# Altium PCB cs301_Group-12-4 holes.PcbDoc
Units mm, origin at the board's own origin, x right, y up, seen from the top; angles counter-clockwise.
Board outline 87.88 x 127 mm, 2 copper layers (Top Layer, Bottom Layer); 146 components, 108 nets, 428 pads, 69 vias.
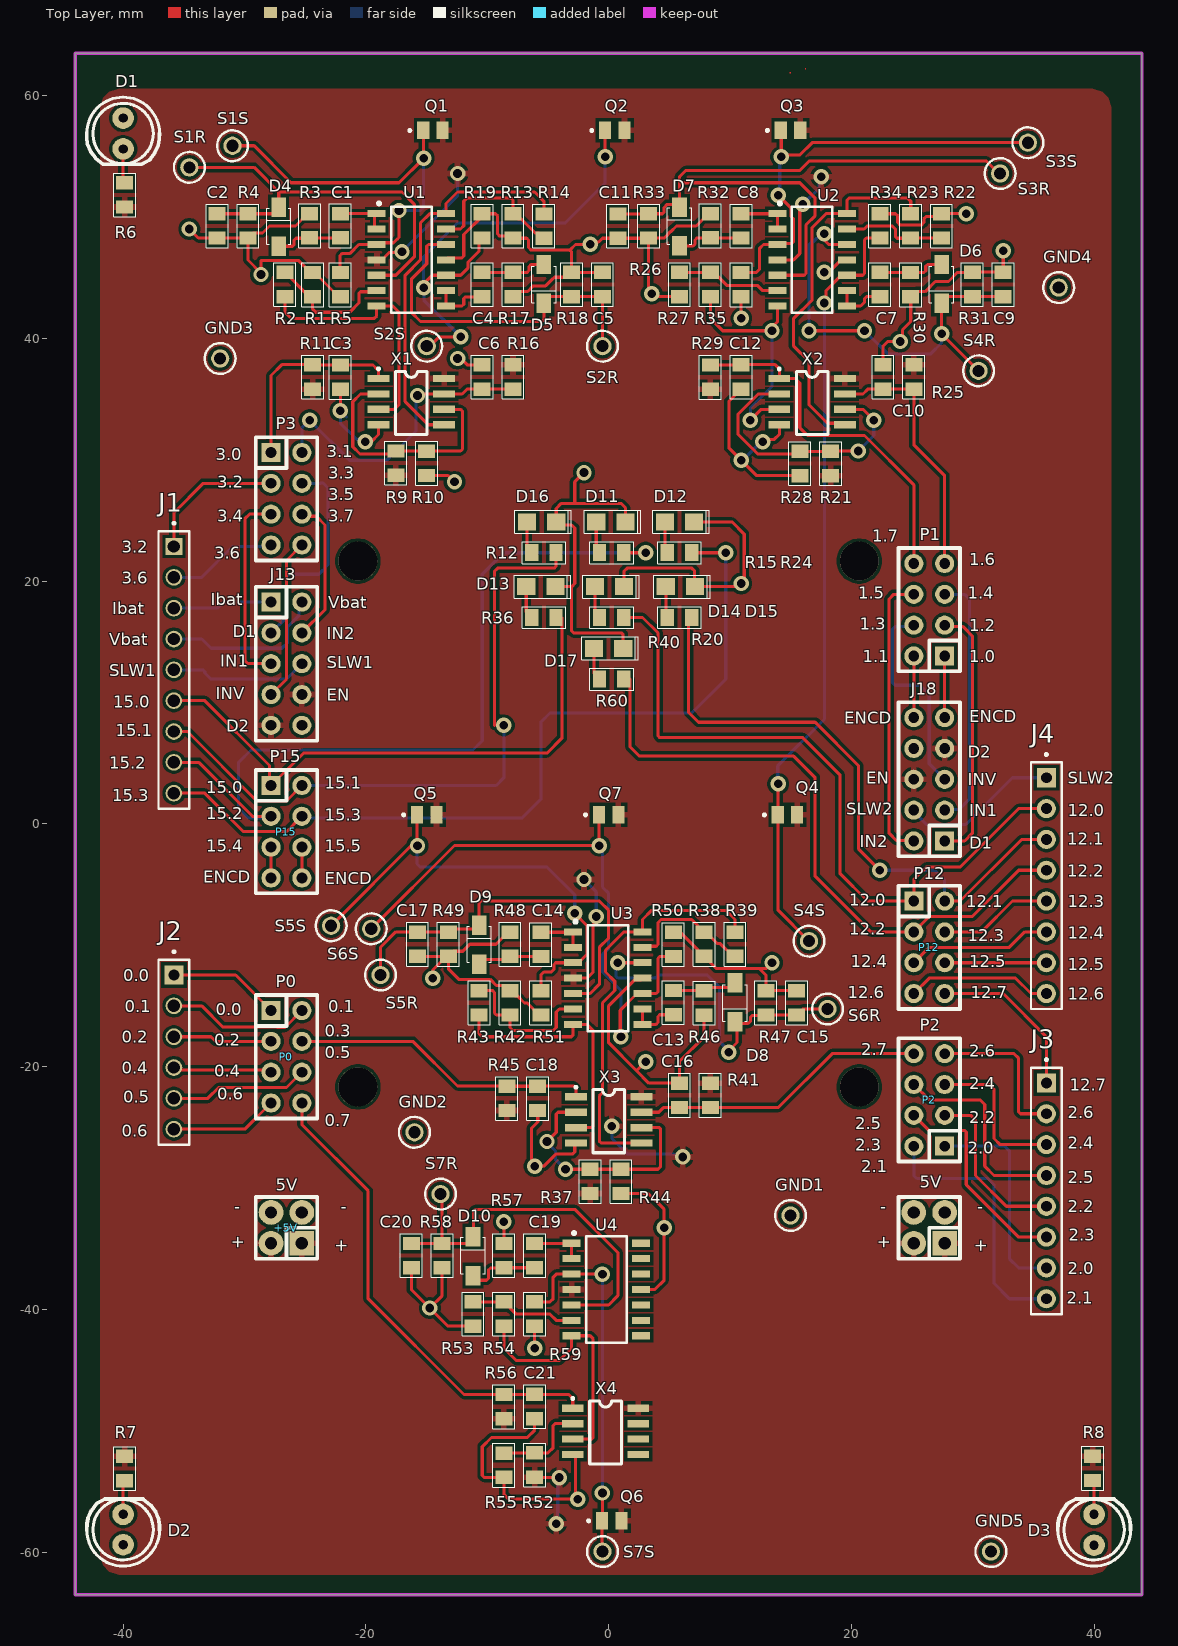
[diagram p0: Top Layer view]
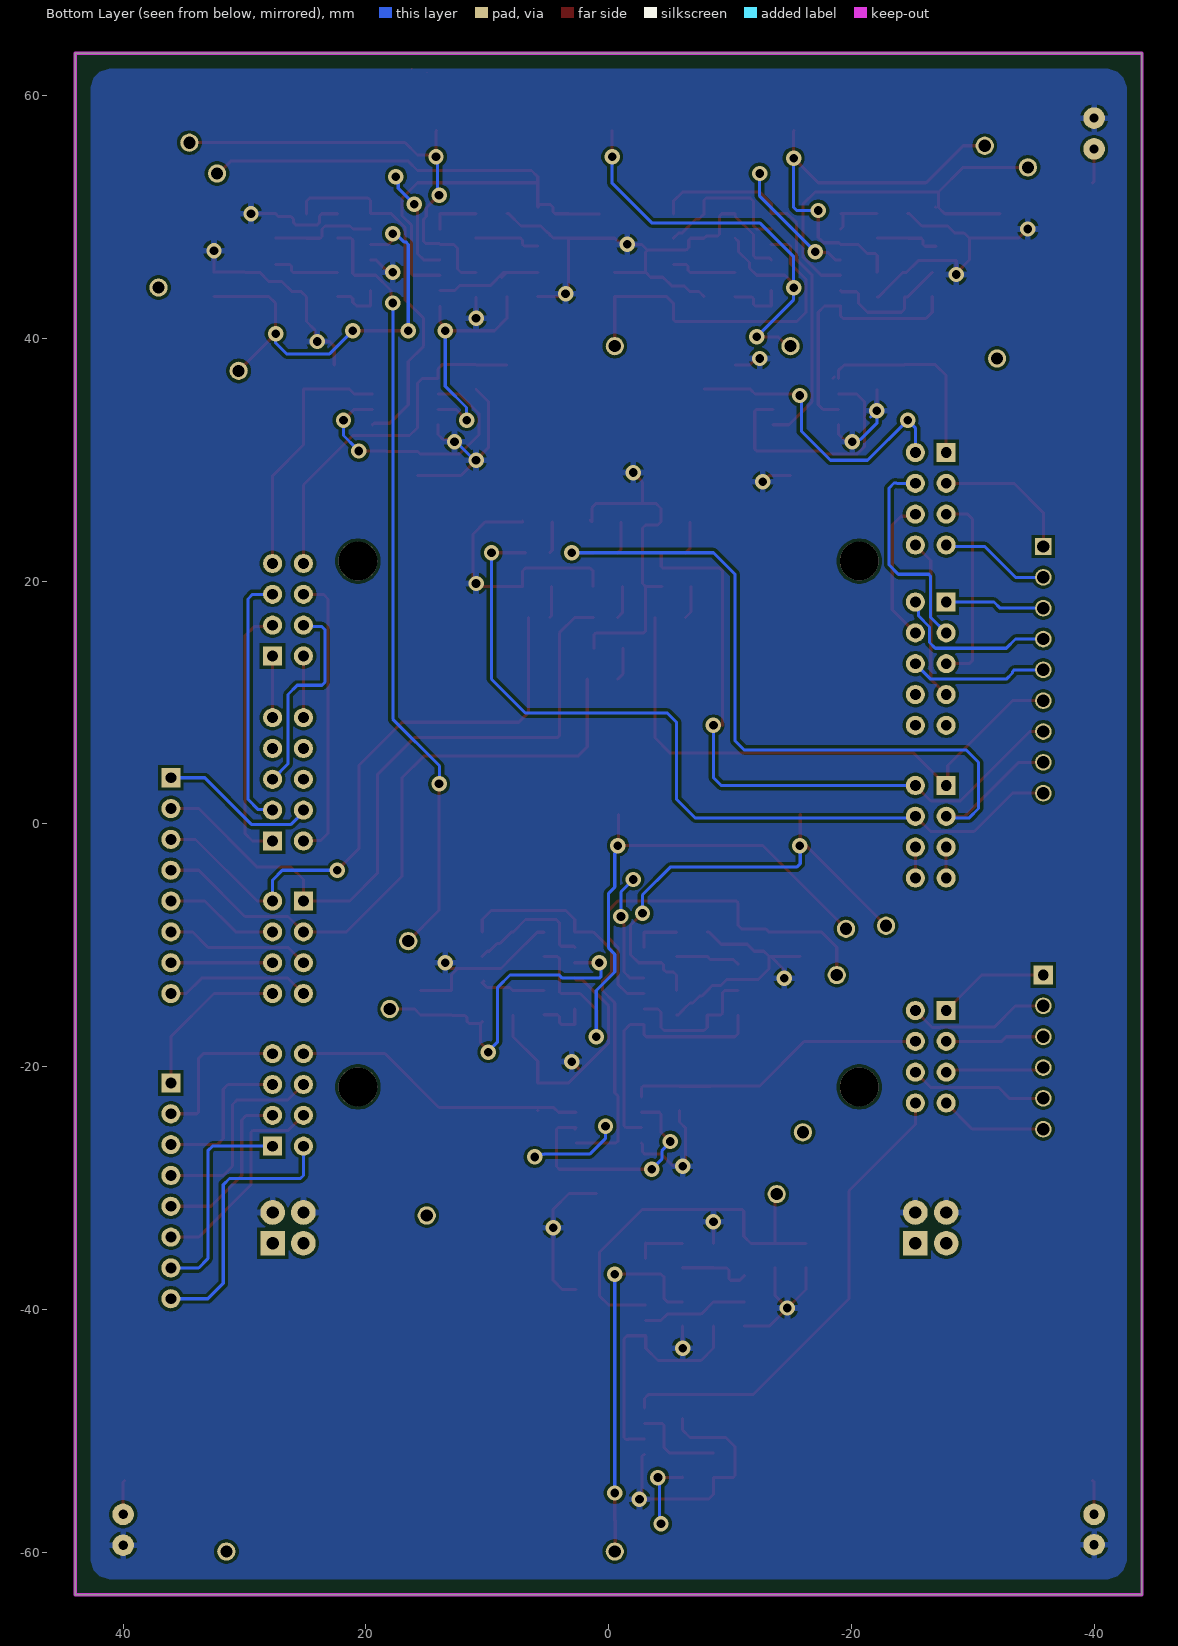
[diagram p1: Bottom Layer view, seen from below]

## Layer stack, top to bottom
Top Solder: solder mask 0.0102, Solder Resist, Dk 3.5
Top Layer: signal copper 0.0356
Dielectric1: dielectric 0.32, FR-4, Dk 4.8
Bottom Layer: signal copper 0.0356
Bottom Solder: solder mask 0.0102, Solder Resist, Dk 3.5

## Board outline
-43.942,-63.5 -43.942,63.5 43.942,63.5 43.942,-63.5

## Design rules (kind name [scope] priority, off if disabled: settings)
Clearance [All] p1: gap=0.254 ignorepadtopadclearanceinfootprint=FALSE except(0: Arc-Hole Track-Hole SMDPad-Hole THPad-Hole Via-Hole Fill-Hole Poly-Hole Region-Hole Text-Hole)
HoleSize [All] p1: absolutevalues=TRUE maxlimit=3.2 minlimit=0.025 maxpercent=80.000 minpercent=20.000
PolygonConnect [All] p1: connectstyle=Relief reliefconductorwidth=0.508 reliefentries=4 polygonreliefangle="90 Angle" airgapwidth=0.254
RoutingVias [All] p1: holewidth=0.711 width=1.27 viastyle="Through Hole" minholewidth=0.711 minwidth=1.27 maxholewidth=0.711 maxwidth=1.27
SMDToCorner [All] p1: distance=157480
SilkToSolderMaskClearance SilkscreenOverComponentPads [IsText] p1: minsilkscreentomaskgap=0.254 clearancetoexposedcopper=TRUE
SolderMaskExpansion [All] p1: expansion=0.102 istentingtop=FALSE
Width [All] p1: maxlimit=0.762 minlimit=0.254 preferedwidth=0.254 minimp=50.000000 maximp=50.000000 favimp=50.000000
28 further rules are at their usual default settings.

## Classes and differential pairs
component class Sensors: C7 C8 C9 C10 C11 C12 C13 C14 C15 C16 C17 C18 C19 C20 C21 D6 D7 D8 D9 D10 Q3 Q4 Q5 Q6 Q7 R21 R22 R23 R25 R26 R27 R28 R29 R30 R31 R32 R33 R34 R35 R37 R38 R39 R41 R42 R43 R44 R45 R46 R47 R48 R49 R50 R51 R52 R53 R54 R55 R56 R57 R58 R59 S3R S3S S4R S4S S5R S5S S6R S6S S7R S7S U2 U3 U4 X2 X3 X4

## Components (designator, comment, footprint, x,y, rotation, side; value= is the part's Value field where it differs from the comment)
5V "5V" IDC4 27.686,-34.544 r90 top locked
+5V "5V" IDC4 -25.273,-34.544 r90 top locked
C1 "*" "0805 CAP" -22.098,49.292 r270 top
C2 "*" "0805 CAP" -32.258,49.276 r270 top
C3 "*" "0805 CAP" -22.098,36.814 r270 top
C4 "*" "0805 CAP" -10.414,44.45 r90 top
C5 "*" "0805 CAP" -0.508,44.45 r90 top
C6 "*" "0805 CAP" -10.414,36.83 r90 top
C7 "*" "0805 CAP" 22.352,44.45 r90 top
C8 "*" "0805 CAP" 10.922,49.276 r270 top
C9 "*" "0805 CAP" 32.512,44.45 r90 top
C10 "*" "0805 CAP" 22.606,36.83 r90 top
C11 "*" "0805 CAP" 0.762,49.26 r270 top
C12 "*" "0805 CAP" 10.922,36.83 r270 top
C13 "*" "0805 CAP" 5.334,-14.716 r90 top
C14 "*" "0805 CAP" -5.588,-9.922 r270 top
C15 "*" "0805 CAP" 15.494,-14.732 r90 top
C16 "*" "0805 CAP" 5.842,-22.352 r90 top
C17 "*" "0805 CAP" -15.748,-9.906 r270 top
C18 "*" "0805 CAP" -5.842,-22.606 r270 top
C19 "*" "0805 CAP" -6.096,-35.56 r270 top
C20 "*" "0805 CAP" -16.256,-35.56 r270 top
C21 "*" "0805 CAP" -6.096,-47.99 r270 top
D1 "LED" LED0.1/5MM#1 -40,55.62 r180 top locked
D2 "LED" LED0.1/5MM#2 -40,-56.88 r0 top locked
D3 "LED" LED0.1/5MM#1 40,-56.88 r0 top locked
D4 "BZT52H-B4V7" SOD123 -27.178,49.25 r90 top
D5 "BZT52H-B4V7" SOD123 -5.334,44.45 r270 top
D6 "BZT52H-B4V7" SOD123 27.432,44.45 r270 top
D7 "BZT52H-B4V7" SOD123 5.842,49.276 r90 top
D8 "BZT52H-B4V7" SOD123 10.414,-14.732 r270 top
D9 "BZT52H-B4V7" SOD123 -10.668,-9.906 r90 top
D10 "BZT52H-B4V7" SOD123 -11.176,-35.56 r90 top
D11 "LTST-C170KGKT" "0805 LED" 0.184,24.892 r0 top
D12 "LTST-C170KGKT" "0805 LED" 5.842,24.892 r0 top
D13 "LTST-C170KGKT" "0805 LED" -5.588,19.558 r0 top
D14 "LTST-C170KGKT" "0805 LED" 0.07,19.558 r0 top
D15 "LTST-C170KGKT" "0805 LED" 5.912,19.558 r0 top
D16 "LTST-C170KGKT" "0805 LED" -5.518,24.892 r0 top
D17 "LTST-C170KGKT" "0805 LED" 0,14.478 r0 top
GND1 "5003" TP_TH 14.986,-32.258 r0 top
GND2 "5003" TP_TH -16.002,-25.4 r0 top
GND3 "5003" TP_TH -32.004,38.354 r0 top
GND4 "5003" TP_TH 37.084,44.196 r0 top
GND5 "5003" TP_TH 31.496,-59.944 r0 top
J1 "9 Pin Header" SAMTEC_MTSW-109-22-G-S-440 -35.814,12.7 r90 top
J2 "6 Pin Header" SAMTEC_TSW-106-07-H-S -35.814,-18.796 r270 top
J3 "8 Pin Header" SAMTEC_TSW-108-05-F-S 36.068,-21.336 r270 top
J4 "8 Pin Header" SAMTEC_TSW-108-05-F-S 36.068,3.81 r270 top
J13 "CON10" IDC10 -27.813,18.288 r270 top locked
J18 "CON10" IDC10 27.686,-1.397 r90 top locked
P0 "P0" idc8 -27.813,-15.367 r270 top locked
P1 "P1" idc8 27.686,13.843 r90 top locked
P2 "P2" idc8 27.686,-26.543 r90 top locked
P3 "P3" idc8 -27.813,30.607 r270 top locked
P12 "P12" idc8 25.146,-6.35 r270 top locked
P15 "P15" IDC8 -27.813,3.175 r270 top locked
Q1 "TEMT6200FX01" XDCR_TEMT6200FX01 -14.478,57.15 r0 top locked
Q2 "TEMT6200FX01" XDCR_TEMT6200FX01 0.508,57.15 r0 top locked
Q3 "TEMT6200FX01" XDCR_TEMT6200FX01 14.986,57.15 r0 top locked
Q4 "TEMT6200FX01" XDCR_TEMT6200FX01 14.732,0.762 r0 top
Q5 "TEMT6200FX01" XDCR_TEMT6200FX01 -14.986,0.762 r0 top
Q6 "TEMT6200FX01" XDCR_TEMT6200FX01 0.254,-57.404 r0 top locked
Q7 "TEMT6200FX01" XDCR_TEMT6200FX01 0,0.762 r0 top
R1 "*" "0805 RES" -24.384,44.434 r90 top
R2 "*" "0805 RES" -26.67,44.45 r90 top
R3 "*" "0805 RES" -24.638,49.292 r270 top
R4 "*" "0805 RES" -29.718,49.276 r90 top
R5 "*" "0805 RES" -22.098,44.434 r90 top
R6 "*" "0805 RES" -39.878,51.832 r270 top
R7 "*" "0805 RES" -39.878,-53.102 r90 top
R8 "*" "0805 RES" 39.878,-53.086 r90 top
R9 "*" "0805 RES" -17.526,29.734 r90 top
R10 "*" "0805 RES" -14.986,29.718 r270 top
R11 "*" "0805 RES" -24.384,36.83 r90 top
R12 "*" "0805 RES" -5.334,22.352 r0 top
R13 "*" "0805 RES" -7.874,49.276 r270 top
R14 "*" "0805 RES" -5.334,49.26 r270 top
R15 "*" "0805 RES" 0.254,22.352 r0 top
R16 "*" "0805 RES" -7.874,36.83 r270 top
R17 "*" "0805 RES" -7.874,44.45 r90 top
R18 "*" "0805 RES" -3.048,44.45 r270 top
R19 "*" "0805 RES" -10.414,49.276 r270 top
R20 "*" "0805 RES" 5.842,17.018 r0 top
R21 "*" "0805 RES" 18.288,29.702 r90 top
R22 "*" "0805 RES" 27.432,49.276 r90 top
R23 "*" "0805 RES" 24.892,49.276 r270 top
R24 "*" "0805 RES" 5.842,22.352 r0 top
R25 "*" "0805 RES" 25.146,36.83 r270 top
R26 "*" "0805 RES" 5.842,44.45 r270 top
R27 "*" "0805 RES" 8.382,44.45 r90 top
R28 "*" "0805 RES" 15.748,29.702 r270 top
R29 "*" "0805 RES" 8.382,36.814 r90 top
R30 "*" "0805 RES" 24.892,44.434 r90 top
R31 "*" "0805 RES" 29.972,44.45 r270 top
R32 "*" "0805 RES" 8.382,49.292 r270 top
R33 "*" "0805 RES" 3.302,49.276 r90 top
R34 "*" "0805 RES" 22.352,49.276 r270 top
R35 "*" "0805 RES" 10.922,44.434 r90 top
R36 "*" "0805 RES" -5.334,17.018 r0 top
R37 "*" "0805 RES" -1.524,-29.448 r90 top
R38 "*" "0805 RES" 7.874,-9.906 r270 top
R39 "*" "0805 RES" 10.414,-9.906 r270 top
R40 "*" "0805 RES" 0.254,17.018 r0 top
R41 "*" "0805 RES" 8.382,-22.352 r270 top
R42 "*" "0805 RES" -8.128,-14.732 r90 top
R43 "*" "0805 RES" -10.668,-14.732 r90 top
R44 "*" "0805 RES" 1.016,-29.448 r270 top
R45 "*" "0805 RES" -8.382,-22.606 r90 top
R46 "*" "0805 RES" 7.874,-14.748 r90 top
R47 "*" "0805 RES" 12.954,-14.732 r270 top
R48 "*" "0805 RES" -8.128,-9.906 r270 top
R49 "*" "0805 RES" -13.208,-9.906 r90 top
R50 "*" "0805 RES" 5.334,-9.922 r270 top
R51 "*" "0805 RES" -5.588,-14.732 r90 top
R52 "*" "0805 RES" -6.096,-52.816 r90 top
R53 "*" "0805 RES" -11.176,-40.37 r270 top
R54 "*" "0805 RES" -8.636,-40.37 r90 top
R55 "*" "0805 RES" -8.636,-52.832 r270 top
R56 "*" "0805 RES" -8.636,-48.006 r90 top
R57 "*" "0805 RES" -8.636,-35.56 r270 top
R58 "*" "0805 RES" -13.716,-35.56 r90 top
R59 "*" "0805 RES" -6.096,-40.37 r90 top
R60 "*" "0805 RES" 0.254,11.938 r0 top
S1R "5003" TP_TH -34.544,54.102 r0 top
S1S "5003" TP_TH -30.988,55.88 r0 top
S2R "5003" TP_TH -0.508,39.37 r0 top
S2S "5003" TP_TH -14.986,39.37 r0 top
S3R "5003" TP_TH 32.258,53.594 r270 top
S3S "5003" TP_TH 34.544,56.134 r0 top
S4R "5003" TP_TH 30.48,37.338 r0 top
S4S "5003" TP_TH 16.51,-9.652 r0 top
S5R "5003" TP_TH -18.796,-12.446 r180 top
S5S "5003" TP_TH -22.86,-8.382 r0 top
S6R "5003" TP_TH 18.034,-15.24 r0 top
S6S "5003" TP_TH -19.558,-8.636 r0 top
S7R "5003" TP_TH -13.848,-30.492 r0 top
S7S "5003" TP_TH -0.508,-59.944 r0 top
U1 "LM324DR2G" SOIC-14 -16.256,46.482 r0 top
U2 "LM324DR2G" SOIC-14 16.764,46.482 r0 top
U3 "LM324DR2G" SOIC-14 -0.066,-12.7 r0 top
U4 "LM324DR2G" SOIC-14 -0.188,-38.354 r0 top
X1 "LM358" "SO - 8" -16.256,34.798 r0 top
X2 "LM358" "SO - 8" 16.764,34.798 r0 top
X3 "LM358" "SO - 8" 0,-24.384 r0 top
X4 "LM358" "SO - 8" -0.254,-50.038 r0 top

## Footprints (in the part's own frame and the unit in brackets; to place one, negate y for a bottom-side part, rotate by r counter-clockwise, add the part's x,y. Pads: shape width x height; smd on the part's side, far side on the other; paste and mask are expansions set on the pad)
"0805 CAP" [mm] "http://www.digikey.co.nz/Web%20Export/Supplier%20Content/Vishay_8026/PDF/VishayBeyschlag_SolderPad.pdf?redirected=1 with dimension G modified by +0.25mm"
  rect 1.1x1.4 smd: 1(-1,0) 2(1,0)
  silkscreen extent -1.8,-0.9 1.8,0.9, body extent -1.04,-0.66 1.04,0.66, height 0.61
"0805 LED" [mm] "RED AS AlGaAs SMD LED, Body; 2mm x 1.25 mm (LxW)"
  rect 1.5x1.4 smd: 1(-1.2,0) 2(1.2,0)
  silkscreen extent -2.2,-0.95 2.45,0.95, body extent -1,-0.63 1,0.63, height 1.1
"0805 RES" [mm] "http://www.digikey.co.nz/Web%20Export/Supplier%20Content/Vishay_8026/PDF/VishayBeyschlag_SolderPad.pdf?redirected=1 with dimension G modified by +0.25mm"
  rect 1.1x1.4 smd: 1(-1,0) 2(1,0)
  silkscreen extent -1.8,-0.9 1.8,0.9, body extent -1.04,-0.66 1.04,0.66, height 0.61
IDC4 [mil]
  rect 80x80 hole 40: 1(0,0)
  round 80 hole 40: 2(0,100) 3(100,0) 4(100,100)
  silkscreen extent -50,-50 150,150
idc8 [mil]
  rect 62x62 hole 35: 1(0,0)
  round 62 hole 35: 2(0,100) 3(100,0) 4(100,100) 5(200,0) 6(200,100) 7(300,0) 8(300,100)
  silkscreen extent -50,-50 350,150
IDC8 [mil]
  rect 62x62 hole 35: 1(0,0)
  round 62 hole 35: 2(0,100) 3(100,0) 4(100,100) 5(200,0) 6(200,100) 7(300,0) 8(300,100)
  silkscreen extent -50,-50 350,150
IDC10 [mil]
  rect 62x62 hole 35: 1(0,0)
  round 62 hole 35: 2(0,100) 3(100,0) 4(100,100) 5(200,0) 6(200,100) 7(300,0) 8(300,100) 9(400,0) 10(400,100)
  silkscreen extent -50,-50 450,150
LED0.1/5MM#1 [mil]
  round 70 hole 30: A(0,0) K(0,-100)
  silkscreen extent -118,-168 118,50
LED0.1/5MM#2 [mil]
  round 70 hole 30: A(0,0) K(0,-98.42)
  silkscreen extent -118,-168 118,50
SAMTEC_MTSW-109-22-G-S-440 [mm]
  rect 1.37x1.37 hole 1.02: 01(10.16,0)
  round 1.37 hole 1.02: 02(7.62,0) 03(5.08,0) 04(2.54,0) 05(0,0) 06(-2.54,0) 07(-5.08,0) 08(-7.62,0) 09(-10.16,0)
  silkscreen extent -11.43,-1.27 12.18,1.27
SAMTEC_TSW-106-07-H-S [mm]
  rect 1.575x1.575 hole 0.889: 01(-6.35,0)
  round 1.37 hole 1.02: 02(-3.81,0) 03(-1.27,0) 04(1.27,0) 05(3.81,0) 06(6.35,0)
  silkscreen extent -8.37,-1.27 7.62,1.27
SAMTEC_TSW-108-05-F-S [mil]
  rect 62x62 hole 35: 01(0,0)
  round 62 hole 35: 02(100,0) 03(200,0) 04(300,0) 05(400,0) 06(500,0) 07(600,0) 08(700,0)
  silkscreen extent -80,-50 750,50
"SO - 8" [mm]
  rect 1.8x0.6 smd: 1(-2.7,1.905) 2(-2.7,0.635) 3(-2.7,-0.635) 4(-2.7,-1.905) 5(2.7,-1.905) 6(2.7,-0.635) 7(2.7,0.635) 8(2.7,1.905)
  silkscreen extent -2.8,-2.7 1.3,2.8, body extent -3.1,-2.5 3.1,2.5, height 1.8
SOD123 [mm] "SOD-123; 2 Leads; Body 2.7 x 1.6 mm, (LxW)"
  rect 1.6x1.2 smd: 1(-1.65,0) 2(1.55,0)
  silkscreen extent -1.5,-1 1.5,1, body extent -1.8,-0.86 1.8,0.86, height 1.21
SOIC-14 [mm] "SOIC, 14-Leads, Body 8.75x4mm, Pitch 1.27mm"
  rect 1.48x0.58 smd: 1(-2.86,3.81) 2(-2.86,2.54) 3(-2.86,1.27) 4(-2.86,0) 5(-2.86,-1.27) 6(-2.86,-2.54) 7(-2.86,-3.81) 8(2.86,-3.81) 9(2.86,-2.54) 10(2.86,-1.27) 11(2.86,0) 12(2.86,1.27) 13(2.86,2.54) 14(2.86,3.81)
  silkscreen extent -2.78,-4.38 1.67,4.77, body extent -3.1,-4.38 3.1,4.37, height 1.75
TP_TH [mm] "Test Point, Through Hole, Dia 2.54mm"
  round 1.5 hole 1: 1(0,0)
  silkscreen extent -1.27,-1.27 1.27,1.27, body extent -1.27,-1.27 1.27,1.27, height 4.57
XDCR_TEMT6200FX01 [mm]
  rect 1x1.45 smd: C(0.8,0) E(-0.8,0)
  silkscreen extent -2,-0.11 -1.8,0.09, body extent -1,-0.63 1,0.63, height 0.85

## Part data
5V +5V: library part CON4, "Connector"
C1 C2 C3 C4 C5 C6 C7 C8 C9 C10 C11 C12 C13 C14 C15 C16 C17 C18 C19 C20 C21: library part CerCap_SMT_0805, "SMT ceramic capacitor 0805 size"
D4 D5 D6 D7 D8 D9 D10: library part Zener_SMT_SOD123, "SMT zener diode with SOD123 package", Manufacturer="Nexperia USA Inc.", Manufacturer Part Number=BZT52H-B4V7,115, Operating Temperature="-65°C ~ 150°C (TA)", Package / Case=SOD-123F, Supplier Part Number 1=1727-1611-1-ND, Tolerance=±2%, Category="Discrete Semiconductor Products", ComponentLink1Description=https://assets.nexperia.com/documents/data-sheet/BZT52H_SER.pdf, ComponentLink1URL=https://assets.nexperia.com/documents/data-sheet/BZT52H_SER.pdf, Mounting Type="Surface Mount", Packaging="Cut Tape (CT)", Part Status=Active, Pricing 1="1=0.51, 10=0.408, 100=0.2164, 500=0.14232, 1000=0.09678 (NZD)", RoHS="RoHS Compliant", Stock 1=0, Supplier 1=Digi-Key, Supplier Device Package=SOD-123F
D11 D12 D13 D14 D15 D16 D17: library part LED_SMT_0805, "SMT LED 0805 size", Color=Green, Current - Test=20mA, Lens Color=Colorless, Manufacturer="Lite-On Inc.", Millicandela Rating=35mcd, Package / Case="0805 (2012 Metric)", Supplier Part Number 1=160-1414-1-ND, Voltage - Forward (Vf) (Typ)=2V, Category=Optoelectronics, ComponentLink1Description=http://optoelectronics.liteon.com/upload/download/DS22-2000-073/LTST-C170KGKT.pdf, ComponentLink1URL=http://optoelectronics.liteon.com/upload/download/DS22-2000-073/LTST-C170KGKT.pdf, Features=-, Height (Max)=1.10mm, Lens Style/Size="Rectangle with Flat Top, 1.40mm x 1.25mm", Lens Transparency=Clear, Manufacturer Part Number=LTST-C170KGKT, Mounting Type="Surface Mount", Packaging="Cut Tape (CT)", Part Status=Active, Pricing 1="1=0.62, 10=0.459, 25=0.338, 100=0.2415, 250=0.16416, 500=0.14486, 1000=0.11347 (NZD)", RoHS="RoHS Compliant", Size / Dimension="2.00mm L x 1.25mm W", Stock 1=503069, Supplier 1=Digi-Key, Viewing Angle=130°, Wavelength - Dominant=571nm, Wavelength - Peak=574nm
GND1 GND2 GND3 GND4 GND5 S1R S1S S2R S2S S3R S3S S4R S4S S5R S5S S6R S6S S7R S7S: library part TestPoint, "Test Point, Orange, 1-Pin THD, RoHS", Forward Current="3 A", Forward Voltage="1.08 V", Max Operating Temperature="150 degC", Max Surge Current="80 A", Min Operating Temperature="-65 degC", Package Quantity=500, Peak Reverse Current="600 uA", ComponentLink1Description="Manufacturer URL", ComponentLink1URL=http://www.keyelco.com/, ComponentLink2Description=Datasheet, ComponentLink2URL=http://keyelco.com/userAssets/file/M65p56.pdf, DatasheetVersion=Jun-15, Diameter="5.3 mm", Height="0.25 inch", Length="9.5 mm", Mount="Through Hole", PackageDescription="1-Pin Through Hole Device, Dia 2.54 mm", PackageReference=5003, Packaging=Bulk, Pins=2, Radiation Hardening=No, REACH SVHC="No SVHC", RoHSCompliant=true, Weight="0.01 lb", Width="0.25 inch"
J1: library part MTSW-109-22-G-S-440, Package=None, Availability=Unavailable, MP=MTSW-109-22-G-S-440, Price=None
J2: library part TSW-106-07-H-S, "Connector Header Through Hole 6 position 0.100 (2.54mm)", Package=None, Availability="In Stock", Check_prices=https://www.snapeda.com/parts/TSW-106-07-H-S/Samtec/view-part/?ref=eda, MF=Samtec, MP=TSW-106-07-H-S, Price=None, Purchase-URL=https://pricing.snapeda.com/search/part/TSW-106-07-H-S/?ref=eda, SnapEDA_Link=https://www.snapeda.com/parts/TSW-106-07-H-S/Samtec/view-part/?ref=snap
J3 J4: library part TSW-108-05-F-S, Package=None, Availability=Unavailable, MP=TSW-108-05-F-S, Price=None
J13 J18: "Connector"
P0 P1 P2 P3: library part CON8, "Connector"
P12 P15: library part CON8_1, "Connector"
Q1 Q2 Q3 Q4 Q5 Q6 Q7: "Phototransistors 550nm Top View 0805 (2012 Metric)", Package="0805 Vishay Semiconductor", Availability=Good, Check_prices=https://www.snapeda.com/parts/TEMT6200FX01/Vishay%20Semiconductor%20Opto%20Division/view-part/43955/?ref=eda, MF="Vishay Semiconductor", MP=TEMT6200FX01, Price=None, Purchase-URL=https://pricing.snapeda.com/search/part/TEMT6200FX01/?ref=eda, SnapEDA_Link=https://www.snapeda.com/parts/TEMT6200FX01/Vishay%20Semiconductor%20Opto%20Division/view-part/43955/?ref=snap
R1 R2 R3 R4 R5 R6 R7 R8 R9 R10 R11 R12 R13 R14 R15 R16 R17 R18 R19 R20 R21 R22 R23 R24 R25 R26 R27 R28 R29 R30 R31 R32 R33 R34 R35 R36 R37 R38 R39 R40 R41 R42 R43 R44 R45 R46 R47 R48 R49 R50 R51 R52 R53 R54 R55 R56 R57 R58 R59 R60: library part Res_SMT_0805, "0805 resistor", ComponentLink1Description=https://nz.mouser.com/datasheet/2/315/AOA0000C304-1149620.pdf, LatestRevisionDate=17-Jul-2002, LatestRevisionNote="Re-released for DXP Platform.", PackageReference=AXIAL-0.4, Published=8-Jun-2000, Publisher="Altium Limited"
U1 U2 U3 U4: library part LM324DR_SMT_SOIC16, "Single Supply Quad Operational Amplifier, 3 to 32 V, 0 to 70 degC, 14-Pin SOIC, Pb-Free, Tape and Reel", Manufacturer="On Semiconductor", ComponentLink1Description="Manufacturer URL", ComponentLink1URL=http://www.onsemi.com/, ComponentLink2Description=Datasheet, ComponentLink2URL=http://www.onsemi.cn/pub_link/Collateral/LM324-D.PDF, ComponentLink3Description="Package Specification", ComponentLink3URL=http://www.onsemi.com/pub_link/Collateral/751A-03.PDF, DatasheetVersion="Rev. 25", Mounting Technology="Surface Mount", PackageDescription="14-Pin Small Outline Integrated Circuit, Body 8.65 x 3.9 mm, Pitch 1.27 mm", PackageReference=SOIC-14-751A-03, PackageVersion="Rev. K, 05/2011", Packing="Tape and Reel", PartNumber=LM324DR2G, RoHS=TRUE, VCC Max (V)=32, VCC Min (V)=3
X1 X2 X3 X4: library part LM358_SMT_SOIC8, "IC OPAMP 8SOIC", Supplier Part Number 1=296-1014-1-ND, ComponentLink1Description=http://www.ti.com/lit/ds/symlink/tlc080a.pdf, ComponentLink1URL=http://www.ti.com/lit/ds/symlink/tlc080a.pdf, Supplier 1=Digi-Key

## Free pads (board coordinates)
  round 3.2 hole 3.2 unplated: 1(-20.65,-21.666) 1(-20.65,21.666) 1(20.65,-21.666) 1(20.65,21.666)

## Via types
v1: diameter 1.27, hole 0.711, Top Layer to Bottom Layer, 69 vias

## Nets (pads, with @x,y where several pads share a name; then routed paths per layer and width w, separated by ;. In a path a pad name is that pad's centre, name@x,y a point inside that pad or via, vN(x,y) a via of type N, cw(c..) or ccw(c..) an arc to the next point about the centre after c; other vN are vias at no path point)
0.0: J2.01 P0.1 | length 9.2
  Top Layer w0.254: J2.01 -30.734,-12.446 P0.1
0.1: J2.02 P0.2 | length 11.9
  Top Layer w0.254: J2.02 -33.528,-14.986 -31.775,-16.739 -27.329,-16.739 -27.304,-16.764 -26.67,-16.764 P0.2
0.2: J2.03 P0.3 | length 8.2
  Top Layer w0.254: J2.03 -32.766,-17.526 -32.385,-17.907 P0.3
0.4: J2.04 P0.5 | length 8.2
  Top Layer w0.254: J2.04 -35.623,-20.257 -28.004,-20.257 P0.5
0.5: J2.05 P0.6 | length 11.4
  Top Layer w0.254: J2.05 -33.02,-22.606 -32.131,-21.717 -26.543,-21.717 -26.416,-21.59 P0.6
0.6: J2.06 P0.7 | length 8.9
  Top Layer w0.254: J2.06 -29.972,-25.146 P0.7
2.0: J3.07 P2.1 | length 17.7
  Bottom Layer w0.254: P2.1 32.639,-26.543 33.02,-26.924 33.02,-35.814 33.782,-36.576 J3.07
2.1: J3.08 P2.2 | length 22.3
  Bottom Layer w0.254: P2.2 25.146,-28.956 25.4,-29.21 31.242,-29.21 31.75,-29.718 31.75,-37.846 33.02,-39.116 J3.08
2.2: J3.05 P2.3 | length 14.2
  Top Layer w0.254: P2.3 29.845,-24.003 30.226,-24.384 30.226,-28.956 32.766,-31.496 J3.05
2.3: J3.06 P2.4 | length 17.6
  Top Layer w0.254: P2.4 26.386,-25.243 29.315,-25.243 29.464,-25.392 29.464,-29.718 33.782,-34.036 J3.06
2.4: J3.03 P2.5 | length 12.8
  Top Layer w0.254: P2.5 31.369,-21.463 31.75,-21.844 31.75,-25.908 32.258,-26.416 J3.03
2.5: J3.04 P2.6 | length 17
  Top Layer w0.254: P2.6 26.412,-22.729 30.603,-22.729 30.988,-23.114 30.988,-28.194 31.75,-28.956 J3.04
2.6: J3.02 P2.7 | length 13
  Top Layer w0.254: P2.7 33.401,-18.923 33.782,-19.304 33.782,-23.727 33.931,-23.876 J3.02
3.2: J1.01 P3.3 | length 11.8
  Top Layer w0.254: J1.01 -35.814,25.654 -33.401,28.067 P3.3
3.6: J1.02 P3.7 | length 9.1
  Bottom Layer w0.254: J1.02 -33.528,20.32 -30.988,22.86 -27.94,22.86 P3.7
12.0: J4.02 P12.1 R40.2 | length 58.4
  Top Layer w0.254: R40.2 2.794,17.018 4.064,15.748 4.064,7.261 4.213,7.112 16.002,7.112 19.05,4.064 19.05,-4.064 21.336,-6.35 P12.1 25.146,-4.572 26.162,-3.556 28.956,-3.556 33.782,1.27 J4.02
12.1: J4.03 P12.2 R20.2 | length 50.9
  Top Layer w0.254: R20.2@6.588,17.018 6.588,9.201 7.407,8.382 17.018,8.382 20.574,4.826 20.574,-2.032 v1(22.352,-3.81) ; P12.2 28.956,-6.35 34.036,-1.27 J4.03
  Bottom Layer w0.254: v1(22.352,-3.81) 26.883,-3.81 27.686,-4.613 P12.2
12.2: J4.04 P12.3 R60.2 | length 53.1
  Top Layer w0.254: R60.2@1.762,11.938 1.762,6.366 2.54,5.588 15.24,5.588 17.018,3.81 17.018,-4.318 21.59,-8.89 P12.3 26.416,-7.62 29.972,-7.62 33.782,-3.81 J4.04
12.3: J4.05 P12.4 | length 9.4
  Top Layer w0.254: P12.4 30.734,-8.89 33.274,-6.35 J4.05
12.4: J4.06 P12.5 | length 12
  Top Layer w0.254: P12.5 26.416,-10.16 33.02,-10.16 34.29,-8.89 J4.06
12.5: J4.07 P12.6 | length 8.4
  Top Layer w0.254: P12.6 J4.07
12.6: J4.08 P12.7 | length 12
  Top Layer w0.254: P12.7 26.416,-12.7 33.528,-12.7 34.798,-13.97 J4.08
12.7: J3.01 P12.8 | length 13.7
  Top Layer w0.254: P12.8 32.512,-13.97 36.068,-17.526 J3.01
15.0: J1.06 P15.1 R36.2 | length 47.3
  Top Layer w0.254: J1.06 -33.274,10.16 -27.94,4.826 -27.94,3.302 P15.1 -25.146,5.842 -5.08,5.842 -3.826,7.096 R36.2@-3.826,17.018
15.1: J1.07 P15.2 R12.2 | length 53.7
  Top Layer w0.254: J1.07 -34.699,7.62 -28.98,1.902 -26.546,1.902 P15.2 ; -9.398,8.128 -9.398,20.828 -9.144,21.082 -4.483,21.082 -4.334,21.231 R12.2
  Bottom Layer w0.254: P15.2 -9.271,3.175 -8.636,3.81 v1(-8.636,8.128)
15.2: J1.08 P15.3 R15.2 | length 67.2
  Top Layer w0.254: J1.08 -33.782,5.08 -29.337,0.635 P15.3 ; R15.2 v1(3.048,22.352)
  Bottom Layer w0.254: P15.3 -27.94,0.508 -29.718,0.508 -30.48,1.27 -30.48,5.08 -29.464,6.096 -11.176,6.096 -10.414,6.858 -10.414,20.574 -8.636,22.352 v1(3.048,22.352)
15.3: J1.09 P15.4 R24.2 | length 69.3
  Top Layer w0.254: J1.09 -33.274,2.54 -30.112,-0.622 -26.53,-0.622 -25.4,0.508 -25.146,0.508 P15.4 ; R24.2 v1(9.652,22.352)
  Bottom Layer w0.254: P15.4 -25.146,0.508 -7.112,0.508 -5.588,2.032 -5.588,8.382 ; -5.588,8.392 -4.836,9.144 6.858,9.144 9.652,11.938 v1(9.652,22.352)
+5V: 5V.1 5V.2 +5V.1 +5V.2 J13.8 J13.9 J18.6 J18.7 Q1.C Q2.C Q3.C Q4.C Q5.C Q6.C Q7.C R6.2 R7.2 R8.2 R9.1 R11.1 R16.1 R21.1 R25.1 R29.1 R37.1 R41.1 R45.1 R52.1 R56.1 U1.4 U2.4 U3.4 U4.4 X1.8 X2.8 X3.8 X4.8 | length 43.3
  Top Layer w0.254: U1.4 -18.666,46.482 -18.053,47.095 -17.08,47.095 v1(-17.021,47.154) ; R52.1 -6.064,-53.848 v1(-4.064,-53.848) ; U3.4 -1.778,-12.7 -1.27,-12.192 -1.27,-8.277 -1.21,-8.217 -1.21,-7.814 v1(-1.016,-7.62) ; U2.4 15.24,46.482 15.748,46.99 15.748,50.546 16.002,50.8 v1(16.002,51.054)
  Bottom Layer w0.254: v1(-17.021,47.154) -12.446,51.729 v1(-12.446,53.594) ; v1(-4.318,-57.658) -4.191,-57.531 -4.191,-53.975 v1(-4.064,-53.848) ; v1(-2.032,-4.572) -1.016,-5.588 v1(-1.016,-7.62) ; v1(0.254,-24.892) 0.273,-24.911 0.273,-25.927 1.524,-27.178 5.334,-27.178 5.394,-27.238 5.902,-27.238 v1(6.096,-27.432) ; v1(16.002,51.054) 17.332,52.384 17.332,53.146 v1(17.526,53.34)
GND: 5V.3 5V.4 +5V.3 +5V.4 C2.2 C3.2 C5.2 C6.2 C9.2 C10.2 C11.2 C12.2 C15.2 C16.2 C17.2 C18.2 C20.2 C21.2 D1.K D2.K D3.K D11.2 D12.2 D13.2 D14.2 D15.2 D16.2 D17.2 R1.2 R3.1 R4.1 R5.1 R10.2 R13.2 R17.1 R18.1 R19.1 R22.2 R26.2 R28.2 R30.1 R31.1 R32.1 R33.1 R34.1 R35.1 R38.2 R42.2 R44.2 R46.1 R47.1 R48.1 R49.1 R50.1 R51.1 R53.2 R55.2 R57.1 R58.1 R59.1 U1.11 U2.11 U3.11 U4.11 X1.4 X2.4 X3.4 X4.4 | length 293.4
  Top Layer w0.254: v1(-34.544,49.022) -33.798,48.276 C2.2 R4.1 ; v1(-28.639,45.275) v1@-28.639,45.385 ; R3.1 -24.788,50.292 -25.804,49.276 -27.94,49.276 -28.517,48.699 -29.295,48.699 R4.1 ; v1(-22.098,34.036) C3.2 ; R5.1 -22.248,43.434 -22.671,43.857 -22.671,43.871 -24.234,45.434 R1.2 -24.534,45.434 -25.519,46.419 -28.639,46.419 v1@-28.639,45.385 ; v1(-20.066,31.496) -19.558,31.496 -18.956,32.098 X1.4 ; C20.2 -16.256,-38.354 v1(-14.732,-39.878) ; C17.2 R49.1@-13.358,-10.906 ; R10.2 -13.224,28.718 v1(-12.7,28.194) ; v1(-14.478,-12.7) -14.478,-12.026 R49.1@-13.358,-10.906 ; R58.1 -13.716,-38.862 v1(-14.732,-39.878) ; U1.11 -13.233,46.645 -12.087,46.645 -11.938,46.794 -11.938,48.563 -10.414,50.087 R19.1 -9.314,50.276 -9.144,50.106 -9.144,48.607 -8.974,48.437 -8.035,48.437 R13.2 -7.858,48.26 -6.753,48.26 -6.604,48.111 -6.604,47.498 -6.387,47.281 -3.197,47.281 ; v1(-12.446,38.354) -12.171,38.354 -11.647,37.83 C6.2 ; R53.2 -13.24,-41.37 v1(-14.732,-39.878) ; R57.1 v1(-8.636,-32.766) ; R48.1 -8.278,-8.906 -9.278,-9.906 -11.43,-9.906 -12.007,-10.483 -12.785,-10.483 R49.1 ; R17.1 -7.451,43.873 -6.673,43.873 -6.208,44.338 -5.188,44.338 -4.607,44.919 -4.576,44.919 -4.449,45.046 -3.452,45.046 R18.1 ; C21.2 -6.096,-49.94 -6.702,-50.546 -9.652,-50.546 -10.414,-51.308 -10.414,-53.683 -10.265,-53.832 R55.2 -8.636,-55.223 -8.233,-55.626 -3.009,-55.626 -2.794,-55.411 v1@-2.794,-55.372 ; v1(-6.096,-43.18) R59.1 ; C18.2 -5.842,-24.556 -6.35,-25.064 -6.35,-27.686 -5.842,-28.194 -5.334,-28.194 -4.318,-27.178 -2.943,-27.178 -2.794,-27.029 -2.794,-26.383 X3.4 ; R51.1 -5.738,-15.732 -6.161,-15.309 -6.161,-15.29 -6.706,-14.745 -6.937,-14.745 -7.527,-14.155 -7.705,-14.155 R42.2 -8.551,-13.309 -9.251,-13.309 -9.759,-12.801 -12.345,-12.801 -13.208,-11.938 R49.1 ; D13.2 -3.048,19.558 ; X4.4 -2.907,-51.943 -2.734,-52.116 -2.734,-55.312 v1@-2.794,-55.372 ; v1(-2.54,-55.626) v1@-2.794,-55.372 ; v1(-2.032,28.956) -2.794,28.194 -2.794,26.416 ; C5.2 R18.1 ; R44.2 3.27,-30.448 4.572,-31.75 v1(4.572,-33.274) 4.572,-37.594 3.812,-38.354 U4.11 ; D17.2 1.2,15.599 1.051,15.748 -2.899,15.748 -3.048,15.897 -3.048,19.558 ; D14.2 1.27,20.828 1.524,21.082 6.858,21.082 7.092,20.848 7.092,19.578 D15.2 10.668,19.558 v1(10.922,19.812) 11.176,20.066 11.176,23.876 10.16,24.892 D12.2 D12.2@7.112,24.962 ; D11.2@1.524,25.032 D11.2 1.384,26.048 1.016,26.416 -2.794,26.416 ; U3.11 2.631,-12.863 2.123,-12.863 0,-14.986 0,-18.034 2.294,-20.328 ; v1(3.048,-19.574) 2.294,-20.328 ; R50.1 5.89,-8.922 R38.2 8.869,-11.901 12.409,-11.901 ; R26.2 3.794,43.45 v1(3.548,43.696) 3.302,43.942 R33.1 ; R46.1 7.874,-17.526 5.842,-19.558 C16.2 3.318,-21.352 2.294,-20.328 ; R32.1 8.232,50.292 7.216,49.276 5.588,49.276 5.119,48.807 5.084,48.807 4.861,48.584 4.861,48.549 4.588,48.276 R33.1 ; C12.2 9.906,34.814 9.906,30.988 v1(10.922,29.972) 12.192,28.702 R28.2 ; v1(10.922,41.656) R35.1 ; v1(12.7,31.496) 12.894,31.69 13.656,31.69 14.064,32.098 X2.4 ; v1(13.462,-11.43) 12.991,-11.901 12.409,-11.901 ; C15.2 R47.1 12.954,-12.446 12.409,-11.901 ; v1(17.78,45.466) 17.974,45.66 18.352,45.66 19.174,46.482 U2.11 ; R34.1 23.638,50.276 23.811,50.103 23.811,49.568 24.034,49.345 25.75,49.345 25.973,49.568 25.973,49.86 26.156,50.043 27.199,50.043 R22.2 27.448,50.292 v1(29.464,50.292) ; C10.2 22.606,39.37 22.978,39.742 24.004,39.742 24.207,39.945 24.207,40.717 24.892,41.402 R30.1 25.315,43.857 26.077,43.857 26.924,44.704 28,44.704 28.746,45.45 R31.1 29.988,45.466 C9.2@32.512,45.466 ; C9.2 C9.2@32.512,45.466 ; v1(32.512,47.244) C9.2@32.512,45.466 ; R4.1 -29.718,46.464 v1@-28.639,45.385 ; R49.1@-13.358,-10.906 R49.1 ; -3.197,47.281 -2.726,47.752 v1(-1.524,47.752) -1.33,47.946 -0.822,47.946 -0.508,48.26 C11.2 3.286,48.26 R33.1 ; -3.197,47.281 -3.048,47.132 R18.1 ; -3.048,19.558 -2.794,19.812 -2.794,24.384 -3.048,24.638 -4.064,24.638 D16.2 -4.318,25.992 -3.894,26.416 -2.794,26.416
  Bottom Layer w0.254: -21.59,33.528 v1(-22.098,34.036) -22.098,33.02 -20.768,31.69 -20.26,31.69 v1(-20.066,31.496) ; v1(10.922,29.972) 11.049,29.972 12.573,31.496 v1(12.7,31.496)
  other v1: -6.096,-28.194 24.013,39.751
Ibat: J1.03 J13.1 | length 8.2
  Bottom Layer w0.254: J1.03 -32.258,17.78 -31.75,18.288 J13.1
NetC1_1: C1.1 U1.1 U1.2 | length 4.4
  Top Layer w0.254: C1.1 -19.141,50.292 -19.304,50.129 -19.304,49.21 U1.2
NetC1_2: C1.2 D4.1 R3.2 | length 5.4
  Top Layer w0.254: D4.1@-26.956,47.6 -26.06,47.6 -25.908,47.752 -25.908,48.111 -25.759,48.26 -24.67,48.26 R3.2 C1.2
NetC2_1: C2.1 D4.2 R4.2 S1R.1 U1.5 | length 34.5
  Top Layer w0.254: S1R.1 -29.21,54.102 -27.178,52.07 ; C2.1 R4.2 -27.702,50.276 D4.2 -27.178,52.07 ; D4.2@-26.963,50.8 D4.2@-26.924,50.839 ; U1.5 -17.526,45.212 -16.002,46.736 -16.002,51.054 -17.018,52.07 -27.178,52.07
NetC4_1: C4.1 U1.8 U1.9 | length 4.8
  Top Layer w0.254: U1.9 U1.8 -12.087,42.672 -11.938,42.821 -11.938,43.285 -11.789,43.434 -10.43,43.434 C4.1
NetC4_2: C4.2 D5.1 R17.2 | length 5.5
  Top Layer w0.254: C4.2 R17.2 -6.705,45.45 -6.557,45.599 -6.557,45.935 -6.408,46.084 D5.1@-5.35,46.084
NetC5_1: C5.1 D5.2 R18.2 S2R.1 U1.12 | length 29.4
  Top Layer w0.254: U1.12 -14.837,47.752 -14.986,47.603 -14.986,46.154 -16.256,44.884 -16.256,42.164 -15.494,41.402 -5.483,41.402 -5.334,41.551 D5.2 -4.784,43.45 R18.2 C5.1 S2R.1
NetC7_1: C7.1 U2.8 U2.9 | length 4.5
  Top Layer w0.254: U2.9 U2.8 20.764,42.672 21.082,42.99 21.082,43.28 21.252,43.45 C7.1
NetC7_2: C7.2 D6.1 R30.2 | length 5.6
  Top Layer w0.254: C7.2 24.876,45.45 R30.2 25.981,45.434 26.13,45.583 26.13,45.951 26.279,46.1 D6.1
NetC8_1: C8.1 U2.1 U2.2 | length 4.3
  Top Layer w0.254: C8.1 13.888,50.276 U2.1 U2.2 U2.2@13.886,49.004
NetC8_2: C8.2 D7.1 R32.2 | length 5.6
  Top Layer w0.254: D7.1 6.963,47.626 7.112,47.775 7.112,48.122 7.282,48.292 R32.2 10.906,48.292 C8.2 C8.2@10.938,48.26
NetC9_1: C9.1 D6.2 R31.2 S4R.1 U2.12 | length 36.9
  Top Layer w0.254: v1(16.51,40.64) v1(21.082,40.64) ; v1@17.526,48.768 17.526,48.361 18.135,47.752 U2.12 ; v1(17.78,48.623) v1@17.974,48.429 ; S4R.1 v1(27.432,40.386) D6.2 27.982,43.45 R31.2 C9.1
  Bottom Layer w0.254: v1(16.51,40.64) 16.51,47.752 16.718,47.96 16.871,47.96 17.534,48.623 v1(17.78,48.623) ; v1(21.082,40.64) 21.082,40.386 21.336,40.386 22.987,38.735 26.543,38.735 27.432,39.624 v1(27.432,40.386)
NetC11_1: C11.1 D7.2 R33.2 S3R.1 U2.5 | length 58.2
  Top Layer w0.254: C11.1 3.286,50.26 R33.2 4.423,50.276 4.572,50.425 4.572,50.8 4.826,51.054 5.614,51.054 D7.2 ; U2.5 16.107,45.212 16.256,45.361 16.256,49.363 17.018,50.125 17.018,51.562 15.748,52.832 5.991,52.832 5.842,52.683 ; S3R.1 32.156,53.594 31.14,54.61 16.51,54.61 15.748,53.848 6.35,53.848 5.842,53.34 5.842,52.683 ; D7.2 5.842,52.683 ; D7.2 5.842,52.683
NetC13_1: C13.1 U3.8 U3.9 | length 4.4
  Top Layer w0.254: U3.9 U3.8 3.915,-16.51 4.064,-16.361 4.064,-15.865 4.213,-15.716 C13.1
NetC13_2: C13.2 D8.1 R46.2 | length 5.6
  Top Layer w0.254: C13.2 7.842,-13.716 R46.2 8.16,-13.462 10.034,-13.462 D8.1 D8.1@10.286,-12.954
NetC14_1: C14.1 U3.1 U3.2 | length 3.9
  Top Layer w0.254: C14.1 -2.958,-8.922 U3.1 U3.2
NetC14_2: C14.2 D9.1 R48.2 | length 5.4
  Top Layer w0.254: D9.1 -10.288,-11.176 -8.398,-11.176 R48.2 -8.112,-10.922 C14.2
NetC15_1: C15.1 D8.2 R47.2 S6R.1 U3.12 | length 29
  Top Layer w0.254: v1(0.762,-11.43) U3.12 ; v1(9.906,-18.796) 9.906,-18.664 10.572,-17.998 D8.2@10.572,-16.44 ; D8.2 D8.2@10.572,-16.44 ; S6R.1 15.986,-15.24 C15.1 R47.2 12.908,-15.778 11.826,-15.778 11.684,-15.919 11.684,-16.256 11.5,-16.44 D8.2@10.572,-16.44
  Bottom Layer w0.254: v1(0.762,-11.43) 0.613,-11.579 0.613,-12.551 0.762,-12.7 3.81,-12.7 4.064,-12.446 8.128,-12.446 9.144,-13.462 9.144,-17.942 9.906,-18.704 v1(9.906,-18.796)
NetC17_1: C17.1 D9.2 R49.2 S5R.1 U3.5 | length 33
  Top Layer w0.254: S5R.1 -18.796,-10.16 -17.526,-8.89 -15.764,-8.89 C17.1 R49.2 -12.938,-8.636 -10.948,-8.636 D9.2 -10.668,-6.499 -10.519,-6.35 -0.762,-6.35 0,-7.112 0,-9.398 -0.762,-10.16 -0.762,-13.208 -1.524,-13.97 U3.5
NetC19_1: C19.1 U4.1 U4.2 | length 4.3
  Top Layer w0.254: C19.1 -3.064,-34.56 U4.1 U4.2
NetC19_2: C19.2 D10.1 R57.2 | length 6.1
  Top Layer w0.254: D10.1 -10.794,-37.592 -10.055,-37.592 -9.906,-37.443 -9.906,-36.746 -9.736,-36.576 -8.652,-36.576 R57.2 C19.2
NetC20_1: C20.1 D10.2 R58.2 S7R.1 U4.5 | length 32.2
  Top Layer w0.254: C20.1 R58.2 ; S7R.1@-13.716,-30.904 R58.2 ; U4.5 0,-39.624 0.762,-38.862 0.762,-35.306 -2.794,-31.75 -10.983,-31.75 -11.132,-31.899 -11.132,-33.966 D10.2 -11.726,-34.56 R58.2
NetD1_A: D1.A R6.1 | length 2.8
  Top Layer w0.254: D1.A -40,52.954 R6.1
NetD2_A: D2.A R7.1 | length 2.8
  Top Layer w0.254: D2.A -40,-54.224 R7.1
NetD3_A: D3.A R8.1 | length 2.8
  Top Layer w0.254: R8.1 40,-54.208 D3.A
NetD11_1: D11.1 R15.1 | length 2.7
  Top Layer w0.254: D11.1 -1.016,22.622 R15.1
NetD12_1: D12.1 R24.1 | length 2.6
  Top Layer w0.254: D12.1 4.642,22.552 R24.1
NetD13_1: D13.1 R36.1 | length 2.7
  Top Layer w0.254: D13.1 -6.788,17.472 R36.1
NetD14_1: D14.1 R40.1 | length 2.7
  Top Layer w0.254: D14.1 -1.13,17.402 R40.1
NetD15_1: D15.1 R20.1 | length 2.6
  Top Layer w0.254: D15.1 4.712,17.148 R20.1
NetD16_1: D16.1 R12.1 | length 2.7
  Top Layer w0.254: D16.1 -6.718,22.736 R12.1
NetD17_1: D17.1 R60.1 | length 2.7
  Top Layer w0.254: D17.1 -1.2,12.392 R60.1
NetJ13_3: J13.3 P3.4 | length 17.7
  Bottom Layer w0.254: J13.3 -26.525,17.035 -26.525,20.425 -26.377,20.574 -23.876,20.574 -23.114,21.336 -23.114,27.686 -23.517,28.089 -23.727,28.089 -23.749,28.067 P3.4
NetJ13_4: J13.4 P3.6 | length 12
  Top Layer w0.254: J13.4 -23.368,17.653 -23.368,24.638 -24.086,25.356 -25.102,25.356 P3.6
NetJ13_5: J13.5 P3.5 | length 16.3
  Top Layer w0.254: J13.5 -29.718,13.208 -29.972,13.462 -29.972,25.146 -29.591,25.527 P3.5
NetJ13_7: J13.7 P3.8 | length 13.4
  Top Layer w0.254: J13.7 -26.543,11.938 -26.543,21.717 P3.8
NetJ18_1: J18.1 P1.3 | length 21.5
  Top Layer w0.254: J18.1 29.337,-1.397 29.972,-0.762 29.972,15.494 29.21,16.256 27.813,16.256 P1.3
NetJ18_2: J18.2 P1.6 | length 23.8
  Top Layer w0.254: J18.2 25.102,-1.353 23.705,-1.353 23.114,-0.762 23.114,18.542 23.495,18.923 P1.6
NetJ18_3: J18.3 P1.5 | length 21.1
  Bottom Layer w0.254: J18.3 27.73,1.187 28.873,1.187 29.718,2.032 29.718,18.542 29.337,18.923 P1.5
NetJ18_5: J18.5 P1.4 | length 17.2
  Bottom Layer w0.254: P1.4 25.019,16.256 23.622,16.256 23.368,16.002 23.368,11.684 23.622,11.43 25.654,11.43 26.416,10.668 26.416,4.953 J18.5
NetJ18_9: J18.9 P1.1 | length 5.1
  Top Layer w0.254: J18.9 P1.1
NetJ18_10: J18.10 P1.2 | length 5.1
  Top Layer w0.254: J18.10 P1.2
NetP15_5: P15.5 P15.7 | length 2.5
  Top Layer w0.254: P15.7 P15.5
NetP15_6: P15.6 P15.8 | length 2.5
  Top Layer w0.254: P15.8 P15.6
NetQ1_E: Q1.E R5.2 S1S.1 U1.3 | length 35.5
  Top Layer w0.254: S1S.1 -29.21,55.88 -26.162,52.832 -17.272,52.832 v1(-15.24,54.864) -15.24,57.112 Q1.E ; R5.2 -22.134,45.47 -22.134,46.834 -21.978,46.99 -21.336,46.99 -20.574,47.752 U1.3 -18.979,47.889 -17.723,47.889 -17.442,48.17 -17.421,48.17 -17.272,48.319 v1(-17.272,50.546)
  Bottom Layer w0.254: v1(-17.272,50.546) -15.494,50.546 -15.24,50.8 v1(-15.24,54.864)
NetQ2_E: Q2.E R19.2 S2S.1 U1.10 | length 39.6
  Top Layer w0.254: S2S.1 -14.722,39.37 -13.96,40.132 v1(-12.192,40.132) ; v1@-14.986,44.762 -14.536,45.212 U1.10 -12.192,45.212 -11.602,45.802 -11.602,46.263 -10.689,47.176 -10.689,48.001 R19.2 ; v1(-0.292,54.972) Q2.E
  Bottom Layer w0.254: v1(-12.192,40.132) -15.221,43.161 -15.221,44.177 v1(-15.24,44.196) -15.24,46.736 -12.446,49.53 -3.556,49.53 -0.292,52.794 v1(-0.292,54.972)
NetQ3_E: Q3.E R35.2 S3S.1 U2.3 | length 37
  Top Layer w0.254: R35.2 12.16,45.434 12.446,45.72 12.446,47.434 12.764,47.752 U2.3 13.993,47.841 15.091,47.841 15.24,47.989 15.24,49.837 15.025,50.052 15.025,50.74 14.848,50.916 14.848,50.938 v1(13.97,51.816) ; Q3.E 14.224,57.112 v1(14.224,54.972) 14.37,55.118 15.748,55.118 16.764,56.134 S3S.1
  Bottom Layer w0.254: v1(13.97,51.816) 14.097,51.943 14.097,54.845 v1(14.224,54.972)
NetQ4_E: Q4.E R34.2 S4S.1 U2.10 | length 64.2
  Top Layer w0.254: v1(13.97,3.302) 13.97,-7.112 S4S.1 ; v1(17.78,42.926) 17.923,43.069 17.923,43.961 19.174,45.212 20.933,45.212 21.082,45.361 21.082,48.127 21.231,48.276 R34.2
  Bottom Layer w0.254: v1@13.932,3.302 13.932,4.788 17.78,8.636 v1(17.78,42.926)
NetQ5_E: Q5.E R51.2 S5S.1 U3.3 | length 40
  Top Layer w0.254: S5S.1 v1@-15.786,-1.308 ; Q5.E v1@-15.786,-1.308 ; R51.2 -5.588,-12.446 -5.334,-12.192 -4.721,-12.192 -4.507,-11.978 -4.507,-11.579 -4.358,-11.43 U3.3 -2.476,-11.43 -1.791,-10.746 -1.791,-8.369 v1(-2.794,-7.366) ; v1@-15.786,-1.308 -15.786,-1.74 v1(-15.748,-1.778) -15.748,-1.27 v1@-15.786,-1.308
  Bottom Layer w0.254: v1@-15.786,-1.778 -15.786,-3.264 -15.494,-3.556 -5.08,-3.556 -2.794,-5.842 v1(-2.794,-7.366)
NetQ6_E: Q6.E R59.2 S7S.1 U4.3 | length 30.5
  Top Layer w0.254: R59.2 -4.826,-39.37 -4.572,-39.116 -4.572,-37.338 -4.318,-37.084 U4.3 v1(-0.508,-37.084) ; S7S.1 -0.546,-59.906 Q6.E -0.508,-57.366 v1(-0.508,-55.118)
  Bottom Layer w0.254: v1@-0.546,-55.118 -0.508,-55.08 v1(-0.508,-37.084)
NetQ7_E: Q7.E R50.2 S6S.1 U3.10 | length 51.1
  Top Layer w0.254: S6S.1 -12.7,-1.778 v1(-0.762,-1.778) -0.8,-1.74 Q7.E ; v1(1.016,-17.526) 0.956,-17.466 0.956,-15.358 2.344,-13.97 3.913,-13.97 4.062,-13.821 4.062,-11.071 4.21,-10.922 R50.2
  Bottom Layer w0.254: v1(-0.762,-1.778) -0.568,-1.972 -0.568,-2.375 -0.508,-2.435 -0.508,-5.202 0,-5.71 0,-10.228 -0.508,-10.736 -0.508,-12.192 1.016,-13.716 v1(1.016,-17.526)
NetR1_1: R1.1 R2.2 U1.6 | length 10.7
  Top Layer w0.254: R2.2 -24.654,43.434 R1.1 -24.384,42.418 -24.13,42.164 -21.336,42.164 -20.574,42.926 -20.574,43.705 -20.425,43.853 -19.205,43.853 U1.6
NetR2_1: R2.1 U1.7 X1.3 | length 21.5
  Top Layer w0.254: R2.1 -26.666,43.446 -26.666,42.16 -26.162,41.656 -19.304,41.656 -19.116,41.844 U1.7 -17.78,42.672 -17.272,42.164 -17.272,34.544 -17.653,34.163 X1.3
NetR13_1: R13.1 R14.2 U1.13 | length 12.3
  Top Layer w0.254: U1.13 -12.197,49.022 -11.938,49.281 -11.938,51.308 -11.684,51.562 -8.023,51.562 -7.874,51.413 R13.1 -7.451,49.853 -7.193,49.853 -6.023,48.683 -5.757,48.683 R14.2
NetR14_1: R14.1 U1.14 X1.5 | length 32.3
  Top Layer w0.254: X1.5 -14.856,32.893 -16.764,34.801 -16.764,45.212 -15.494,46.482 -15.494,49.53 -14.732,50.292 U1.14 -13.396,51.12 -12.446,52.07 -6.096,52.07 -5.334,51.308 R14.1
NetR22_1: R22.1 R23.2 U2.13 | length 8.7
  Top Layer w0.254: U2.13@19.646,49 U2.13 21.05,49.022 21.304,49.276 23.368,49.276 23.622,49.022 23.622,48.409 23.771,48.26 24.876,48.26 R23.2 R22.1
NetR23_1: R23.1 U2.14 X2.5 | length 30.3
  Top Layer w0.254: X2.5 19.337,33.02 18.034,33.02 16.51,34.544 16.51,38.1 15.24,39.37 15.24,41.656 16.764,43.18 16.764,49.153 17.903,50.292 U2.14 19.624,51.374 19.812,51.562 24.638,51.562 24.892,51.308 R23.1
NetR26_1: R26.1 R27.2 U2.6 | length 9.3
  Top Layer w0.254: R26.1 R27.2 ; R27.2@8.805,45.027 R27.2 ; U2.6 12.7,43.942 12.29,44.352 11.793,44.352 11.764,44.381 9.724,44.381 8.655,45.45 R27.2
NetR27_1: R27.1 U2.7 X2.3 | length 20.4
  Top Layer w0.254: R27.1 8.382,41.656 9.398,40.64 v1(13.462,40.64) 13.462,40.915 13.904,41.357 U2.7 ; v1(11.684,33.274) 12.573,34.163 X2.3
  Bottom Layer w0.254: v1(11.684,33.274) 11.703,33.293 11.703,34.309 13.462,36.068 v1(13.462,40.64)
NetR38_1: R38.1 R39.2 U3.13 | length 10.9
  Top Layer w0.254: U3.13 2.883,-10.071 3.915,-10.071 4.064,-9.923 4.064,-8.128 4.318,-7.874 6.842,-7.874 R38.1 8.024,-8.906 8.976,-9.858 9.208,-9.858 9.834,-10.483 9.991,-10.483 R39.2
NetR39_1: R39.1 U3.14 X3.5 | length 34.1
  Top Layer w0.254: X3.5 -0.613,-26.289 -0.762,-26.14 -0.762,-22.399 -0.508,-22.145 -0.508,-14.732 0.508,-13.716 0.508,-12.954 -0.254,-12.192 -0.254,-10.414 1.27,-8.89 U3.14 2.794,-7.874 3.556,-7.112 9.652,-7.112 10.414,-7.874 R39.1
NetR42_1: R42.1 R43.2 U3.6 | length 12.2
  Top Layer w0.254: R43.2 -9.547,-13.732 -9.398,-13.881 -9.398,-15.583 -9.249,-15.732 R42.1 -8.128,-16.764 -7.874,-17.018 -4.572,-17.018 -4.318,-16.764 -4.318,-15.494 -4.064,-15.24 U3.6
NetR43_1: R43.1 U3.7 X3.3 | length 21.5
  Top Layer w0.254: R43.1 -10.664,-15.736 -10.664,-17.276 -10.414,-17.526 -3.075,-17.526 -2.926,-17.377 U3.7 -1.786,-16.51 -1.27,-17.026 -1.27,-24.87 -1.419,-25.019 X3.3
NetR52_2: R52.2 R55.1 X4.2 | length 7.8
  Top Layer w0.254: R55.1@-8.62,-51.816 R55.1 -6.112,-51.832 R52.2 -4.996,-51.816 -4.572,-51.392 -4.572,-49.552 -4.423,-49.403 X4.2
NetR53_1: R53.1 R54.2 U4.6 | length 8.8
  Top Layer w0.254: R53.1 R54.2 -7.62,-40.386 -4.826,-40.386 -4.318,-40.894 U4.6
NetR54_1: R54.1 U4.7 X4.3 | length 21
  Top Layer w0.254: R54.1 -8.636,-43.18 -7.62,-44.196 -4.064,-44.196 -3.062,-43.194 -3.062,-42.178 U4.7 -1.524,-42.164 -1.27,-42.418 -1.27,-50.546 -1.419,-50.695 -1.629,-50.695 ; X4.3 -1.651,-50.673
S1: C3.1 P3.1 R11.2 X1.1 | length 16.6
  Top Layer w0.254: P3.1 -27.813,36.957 -26.924,37.846 -24.4,37.846 R11.2 -22.114,37.83 C3.1 -19.406,37.814 -19.05,37.458 -19.011,37.458 -18.956,37.403 X1.1 ; X1.1@-18.6,36.827 X1.1@-18.476,36.703
S1S2COMPV: R9.2 R10.1 X1.2 X1.6 | length 20.3
  Top Layer w0.254: X1.2 -20.447,35.433 -21.082,34.798 -21.082,31.075 -20.487,30.48 -17.78,30.48 R9.2 -15.24,30.734 -12.192,30.734 -12.043,30.883 -12.043,34.014 -12.192,34.163 X1.6
S2: C6.1 P3.2 R16.2 X1.7 | length 24.8
  Top Layer w0.254: v1@-15.748,35.56 -15.621,35.433 X1.7 -13.554,35.435 -12.063,35.435 -11.668,35.83 C6.1 R16.2
  Bottom Layer w0.254: P3.2 -25.273,32.639 v1@-24.892,33.02 ; v1(-24.638,33.274) -21.336,29.972 -18.288,29.972 -15.875,32.385 -15.875,35.179 v1(-15.748,35.306)
S3: C12.1 P1.8 R29.2 X2.1 | length 30
  Top Layer w0.254: R29.2 10.906,37.814 C12.1 10.938,37.846 13.716,37.846 14.064,37.498 X2.1 15.367,36.703 15.748,36.322 15.748,32.661 16.405,32.004 21.082,32.004 25.146,27.94 P1.8
S3S4COMPV: R21.2 R28.1 X2.2 X2.6 | length 22.4
  Top Layer w0.254: X2.2 12.319,35.433 10.668,33.782 10.668,32.091 12.279,30.48 15.526,30.48 R28.1 R21.2 18.32,30.734 v1(20.574,30.734) ; X2.6 20.955,34.163 v1(21.844,33.274)
  Bottom Layer w0.254: v1(20.574,30.734) 20.574,30.988 20.828,30.988 21.844,32.004 v1(21.844,33.274)
S4: C10.1 P1.7 R25.2 X2.7 | length 21.3
  Top Layer w0.254: X2.7 20.955,35.433 21.352,35.83 C10.1 R25.2 25.146,31.242 27.686,28.702 P1.7
S5: C18.1 P0.4 R45.2 X3.1 | length 24.9
  Top Layer w0.254: P0.4 -16.129,-17.907 -12.446,-21.59 -8.398,-21.59 R45.2 C18.1 -5.826,-21.59 -2.849,-21.59 -2.7,-21.739 X3.1
S5S6COMPV: R37.2 R44.1 X3.2 X3.6 | length 20
  Top Layer w0.254: v1(-5.08,-26.162) -4.318,-25.4 -4.318,-23.898 -4.169,-23.749 X3.2 ; v1(-3.556,-28.448) R37.2 R44.1 4.064,-28.448 4.289,-28.223 4.289,-25.139 4.169,-25.019 X3.6 2.7,-25.052 X3.6@2.794,-25.146
  Bottom Layer w0.254: v1(-5.08,-26.162) -5.08,-26.239 -4.387,-26.932 -4.387,-27.617 v1(-3.556,-28.448)
S6: C16.1 P2.8 R41.2 X3.7 | length 24.4
  Top Layer w0.254: X3.7 4.127,-23.749 4.508,-23.368 5.826,-23.368 C16.1 R41.2 13.986,-23.352 18.415,-18.923 P2.8
S7: C21.1 P0.8 R56.2 X4.1 | length 39.5
  Top Layer w0.254: P0.8 -25.273,-24.765 -19.812,-30.226 -19.812,-39.116 -11.922,-47.006 R56.2 -6.112,-47.006 C21.1 -3.302,-46.99 -2.954,-47.338 X4.1
SLW1: J1.05 J13.6 | length 11.4
  Bottom Layer w0.254: J1.05 -33.423,12.7 -33.274,12.551 -33.274,12.446 -32.766,11.938 -26.543,11.938 J13.6
SLW2: J4.01 J18.4 | length 13.1
  Bottom Layer w0.254: J18.4 25.146,0.988 26.159,-0.025 29.439,-0.025 33.274,3.81 J4.01
Vbat: J1.04 J13.2 | length 13.7
  Bottom Layer w0.254: J1.04 -33.528,15.24 -32.766,14.478 -26.924,14.478 -26.441,14.961 -26.441,16.232 -25.526,17.148 -25.526,18.035 J13.2
pads on no net: GND1.1 GND2.1 GND3.1 GND4.1 GND5.1 J13.10 J18.8 U4.8 U4.9 U4.10 U4.12 U4.13 U4.14 X4.5 X4.6 X4.7

## Polygon pours and split planes (outlines as drawn)
GND on Bottom Layer "GND_L02_P000" (solid, pour order 0): -42.672,-60.706 -42.418,-61.468 -41.91,-61.976 -41.148,-62.23 41.148,-62.23 41.91,-61.976 42.418,-61.468 42.672,-60.706 42.672,60.706 42.418,61.468 41.91,61.976 41.148,62.23 -41.148,62.23 -41.91,61.976 -42.418,61.468 -42.672,60.706
+5V on Top Layer "+5V_L01_P002" (solid, pour order 2): -41.644,59.822 -41.136,60.33 -40.374,60.584 39.89,60.584 40.652,60.33 41.16,59.822 41.414,59.06 41.414,-60.32 41.16,-61.082 40.652,-61.59 39.89,-61.844 -40.374,-61.844 -41.136,-61.59 -41.644,-61.082 -41.898,-60.32 -41.898,59.06

## Keep-outs
Keep-Out Layer:
  the board outline again, w0.254

## Other copper
Top Layer:
  region: 16.243,62.262 16.243,62.205 16.186,62.205 16.186,62.262
  region: 14.929,61.862 14.929,61.919 14.986,61.919 14.986,61.862

## Silkscreen, mask and mechanical layers (free items; w line width, h text height)
Top Overlay:
  text "3.1" at -23.241,30.226 h1
  text "3.0" at -32.385,29.972 h1
  text "3.3" at -23.114,28.448 h1
  text "3.2" at -32.258,27.686 h1
  text "3.5" at -23.114,26.67 h1
  text "3.7" at -23.093,24.913 h1
  text "3.4" at -32.258,24.892 h1
  text "1.7" at 21.717,23.241 h1
  text "3.2" at -40.132,22.352 h1
  text "3.6" at -32.512,21.844 h1
  text "1.6" at 29.718,21.336 h1
  text "3.6" at -40.132,19.812 h1
  text "1.5" at 20.574,18.542 h1
  text "1.4" at 29.591,18.542 h1
  text "Ibat" at -32.766,18.034 h1
  text "Vbat" at -23.114,17.78 h1
  text "Ibat" at -40.894,17.272 h1
  text "1.3" at 20.701,16.002 h1
  text "1.2" at 29.718,15.875 h1
  text "D1" at -30.988,15.367 h1
  text "IN2" at -23.241,15.24 h1
  text "Vbat" at -41.148,14.732 h1
  text "1.1" at 20.955,13.335 h1
  text "1.0" at 29.718,13.335 h1
  text "IN1" at -32.004,12.954 h1
  text "SLW1" at -23.241,12.827 h1
  text "SLW1" at -41.148,12.192 h1
  text "INV" at -32.385,10.287 h1
  text "EN" at -23.241,10.16 h1
  text "15.0" at -40.834,9.568 h1
  text "ENCD" at 29.718,8.382 h1
  text "ENCD" at 19.431,8.255 h1
  text "D2" at -31.496,7.62 h1
  text "15.1" at -40.615,7.22 h1
  text "D2" at 29.591,5.461 h1
  text "15.2" at -41.148,4.572 h1
  text "EN" at 21.209,3.302 h1
  text "SLW2" at 37.846,3.302 h1
  text "INV" at 29.591,3.175 h1
  text "15.1" at -23.368,2.921 h1
  text "15.0" at -33.147,2.54 h1
  text "15.3" at -40.879,1.866 h1
  text "SLW2" at 19.558,0.762 h1
  text "IN1" at 29.718,0.635 h1
  text "12.0" at 37.846,0.635 h1
  text "15.2" at -33.147,0.381 h1
  text "15.3" at -23.368,0.254 h1
  text "12.1" at 37.784,-1.725 h1
  text "IN2" at 20.701,-1.905 h1
  text "D1" at 29.718,-2.032 h1
  text "15.4" at -33.147,-2.286 h1
  text "15.5" at -23.368,-2.286 h1
  text "12.2" at 37.804,-4.329 h1
  text "ENCD" at -33.401,-4.826 h1
  text "ENCD" at -23.368,-4.953 h1
  text "12.0" at 19.812,-6.731 h1
  text "12.1" at 29.464,-6.858 h1
  text "12.3" at 37.846,-6.858 h1
  text "12.2" at 19.812,-9.144 h1
  text "12.4" at 37.822,-9.45 h1
  text "12.3" at 29.591,-9.652 h1
  text "12.4" at 19.939,-11.811 h1
  text "12.5" at 29.718,-11.811 h1
  text "12.5" at 37.846,-12.065 h1
  text "0.0" at -40.005,-12.954 h1
  text "12.6" at 19.685,-14.351 h1
  text "12.7" at 29.845,-14.351 h1
  text "12.6" at 37.846,-14.478 h1
  text "0.1" at -39.878,-15.494 h1
  text "0.1" at -23.114,-15.494 h1
  text "0.0" at -32.385,-15.748 h1
  text "0.3" at -23.368,-17.526 h1
  text "0.2" at -40.132,-18.034 h1
  text "0.2" at -32.512,-18.288 h1
  text "2.7" at 20.828,-19.05 h1
  text "2.6" at 29.718,-19.177 h1
  text "0.5" at -23.368,-19.304 h1
  text "0.4" at -40.132,-20.574 h1
  text "0.4" at -32.512,-20.828 h1
  text "2.4" at 29.718,-21.844 h1
  text "12.7" at 37.973,-21.971 h1
  text "0.6" at -32.258,-22.733 h1
  text "0.5" at -40.005,-22.987 h1
  text "2.6" at 37.846,-24.257 h1
  text "2.2" at 29.718,-24.638 h1
  text "0.7" at -23.368,-24.892 h1
  text "2.5" at 20.32,-25.146 h1
  text "0.6" at -40.132,-25.781 h1
  text "2.4" at 37.844,-26.768 h1
  text "2.3" at 20.32,-26.924 h1
  text "2.0" at 29.591,-27.178 h1
  text "2.1" at 20.828,-28.702 h1
  text "2.5" at 37.809,-29.586 h1
  text "-" at -30.353,-31.242 h1 r180
  text "-" at -21.59,-31.242 h1 r180
  text "-" at 22.86,-31.242 h1 r180
  text "-" at 30.861,-31.242 h1 r180
  text "2.2" at 37.846,-32.004 h1
  text "2.3" at 37.899,-34.329 h1
  text "+" at -30.099,-35.052 h1 r90
  text "+" at 23.114,-35.052 h1 r90
  text "+" at -21.59,-35.306 h1 r90
  text "+" at 31.115,-35.306 h1 r90
  text "2.0" at 37.846,-37.084 h1
  text "2.1" at 37.765,-39.547 h1